# EAGLE board untitled2 (EAGLE 9.6.1)
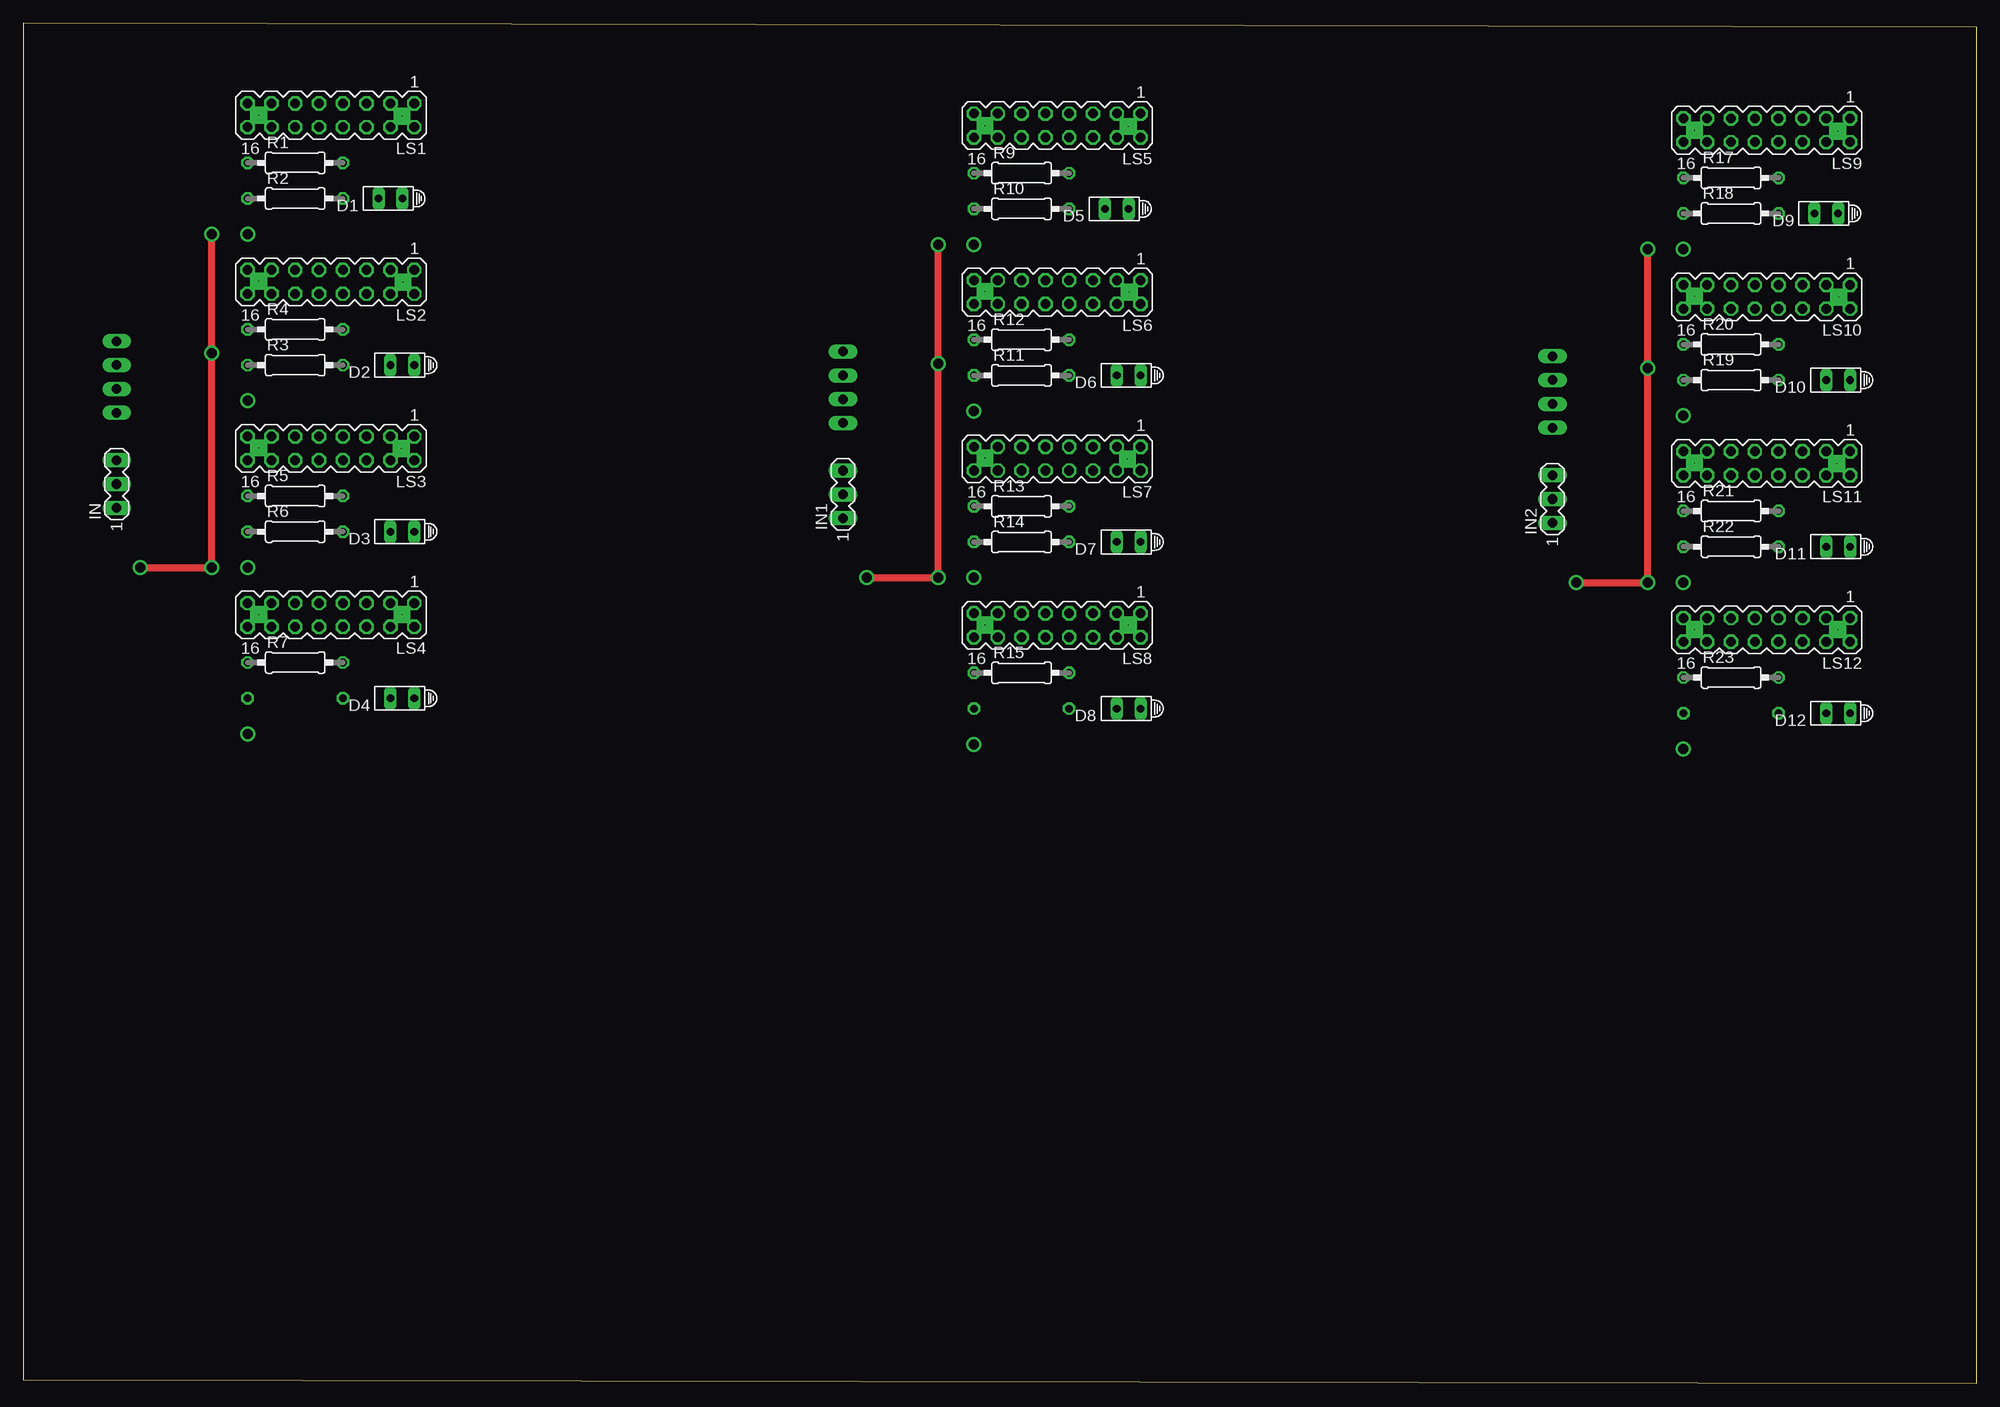
[diagram p0: board, top side]
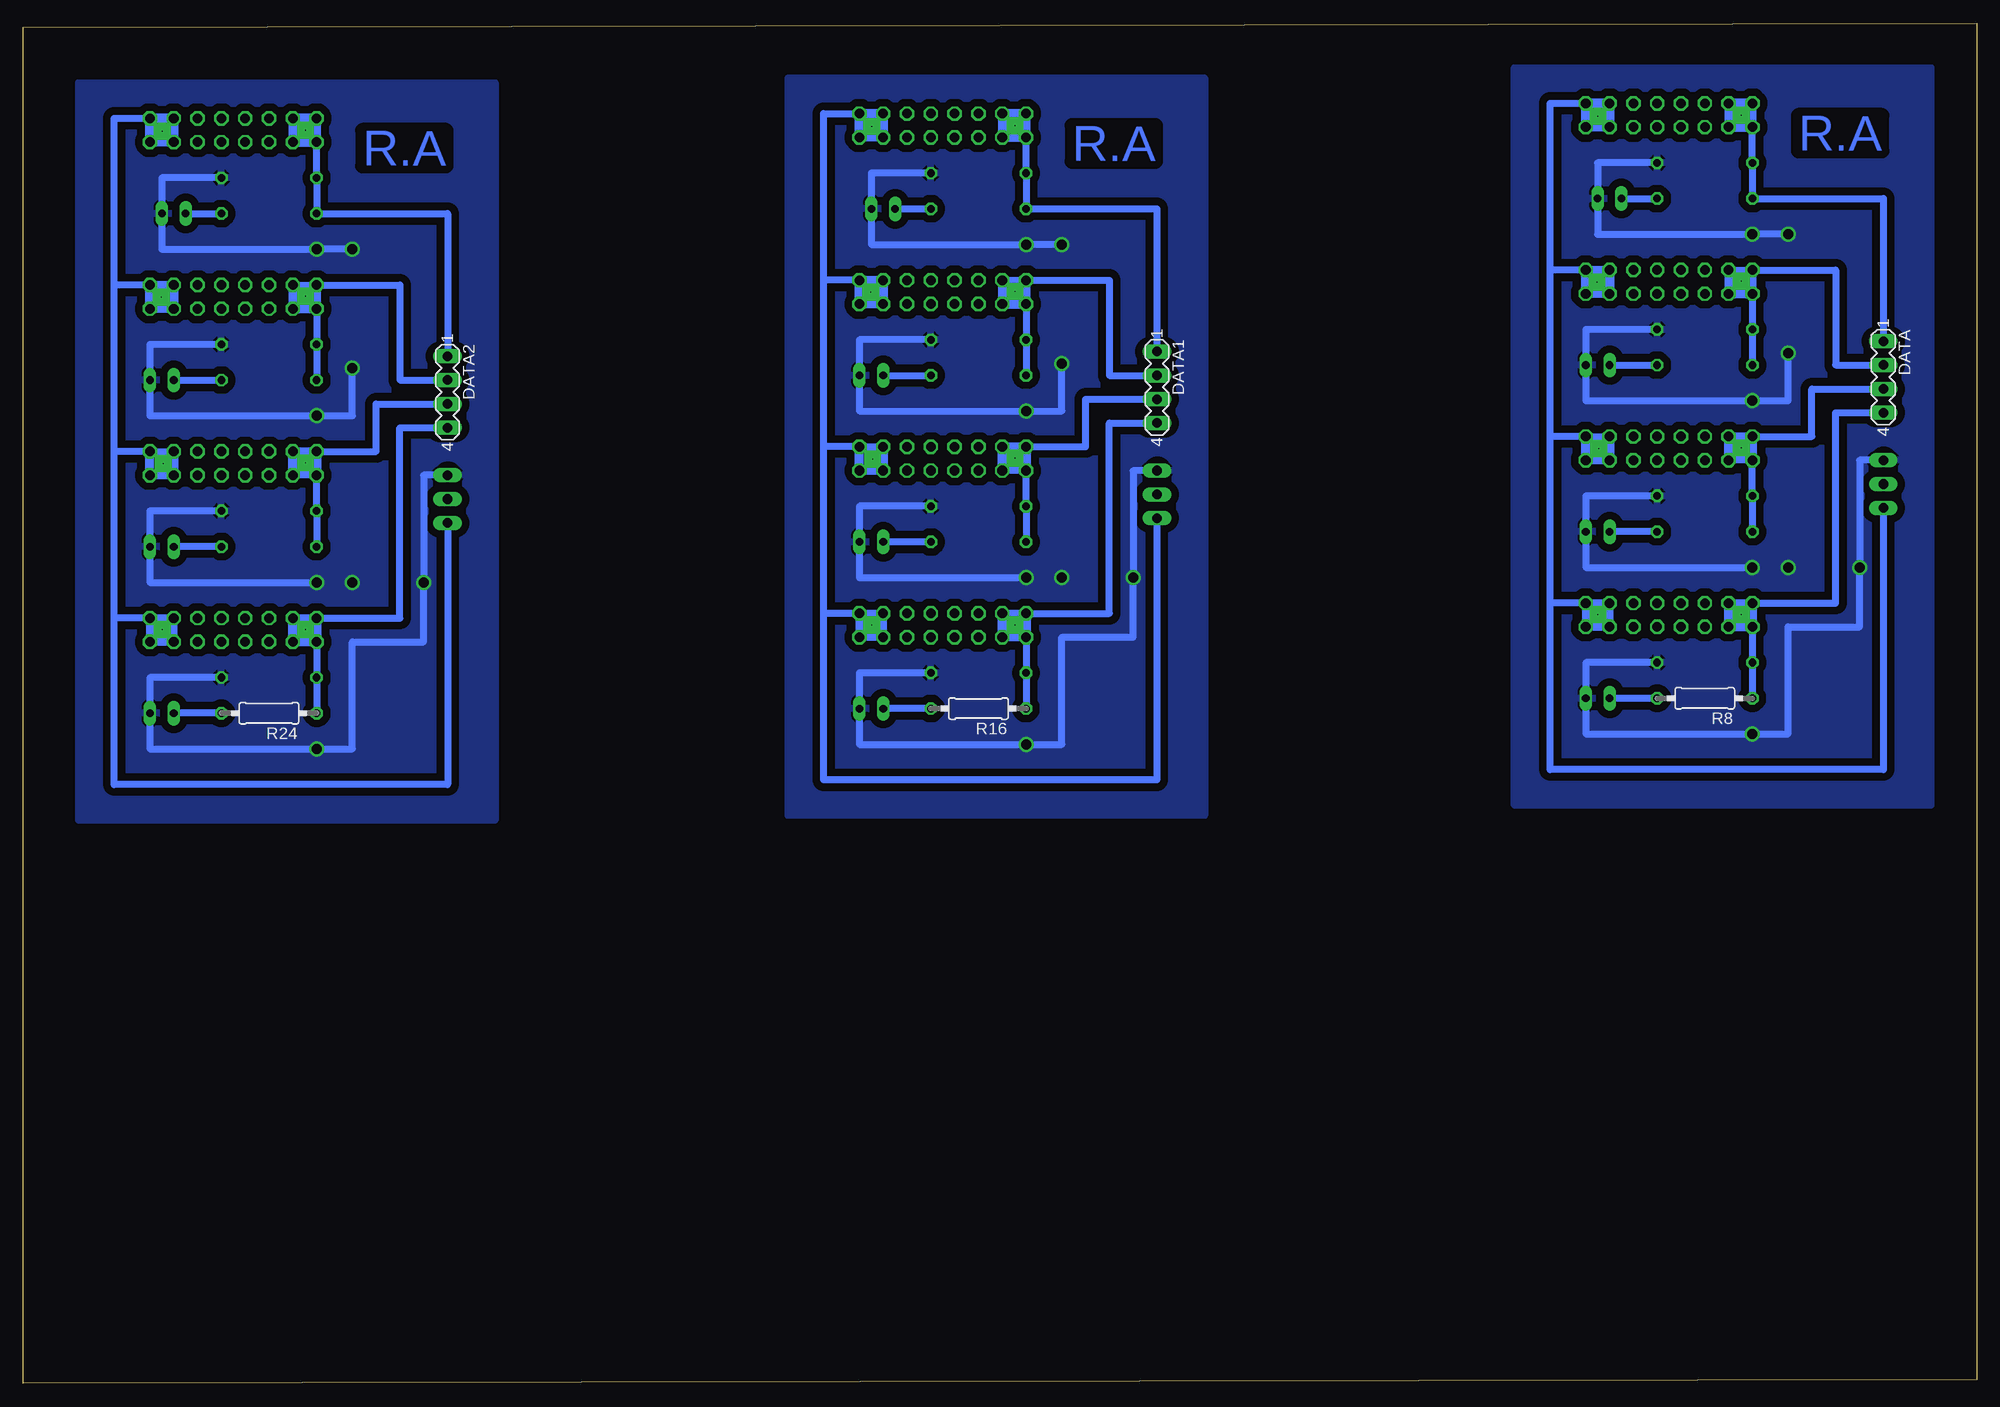
[diagram p1: board, bottom side, seen from below]

Size 208.4 x 145.17 mm. Coordinates in mm from the lower left corner, seen from the top.
Outline: 0,0.4 208.4,0 208.4,144.77 0,145.17 0,0.4
Copper layers (1*16): Top 0.035mm / dielectric 1.5mm / Bottom 0.035mm
Design rules "default": minimum track width 6mil, minimum drill 0.35mm, track to track 6mil, track to pad 6mil, pad to pad 6mil, via to via 6mil, smd to smd 6mil, copper to edge 40mil, drill to drill 6mil, minimum pad ring 10mil, minimum via ring 8mil, stop-mask expansion 4mil, vias tented up to drill 0mil, thermal gap 10mil

## Footprints (pad centres in the part's own frame; a part is rotated, then mirrored left to right if it is on the bottom)
HLMP6 = drill 0.813 long: A -1.27,0; K 1.27,0
MA04-1 = drill 1.016 long: 1 -3.81,0; 2 -1.27,0; 3 1.27,0; 4 3.81,0
MA03-1 = drill 1.016 long: 1 -2.54,0; 2 0,0; 3 2.54,0
MA08-2 = drill 1.016 octagon: 1 -8.89,-1.27; 2 -8.89,1.27; 3 -6.35,-1.27; 4 -6.35,1.27; 5 -3.81,-1.27; 6 -3.81,1.27; 7 -1.27,-1.27; 8 -1.27,1.27; 9 1.27,-1.27; 10 1.27,1.27; 11 3.81,-1.27; 12 3.81,1.27; 13 6.35,-1.27; 14 6.35,1.27; 15 8.89,-1.27; 16 8.89,1.27
0207/10 = drill 0.813 octagon: 1 -5.08,0; 2 5.08,0

## Placement (x,y rotation side)
D1  HLMP6  [HLMP6]  39.16,126.48 180 top
D2  HLMP6  [HLMP6]  40.43,108.7 180 top
D3  HLMP6  [HLMP6]  40.43,90.92 180 top
D4  HLMP6  [HLMP6]  40.43,73.14 180 top
D5  HLMP6  [HLMP6]  116.66,125.38 180 top
D6  HLMP6  [HLMP6]  117.93,107.6 180 top
D7  HLMP6  [HLMP6]  117.93,89.82 180 top
D8  HLMP6  [HLMP6]  117.93,72.04 180 top
D9  HLMP6  [HLMP6]  192.36,124.88 180 top
D10  HLMP6  [HLMP6]  193.63,107.1 180 top
D11  HLMP6  [HLMP6]  193.63,89.32 180 top
D12  HLMP6  [HLMP6]  193.63,71.54 180 top
DATA  [MA04-1]  9.95,107.43 270 bottom
DATA1  [MA04-1]  87.45,106.33 270 bottom
DATA2  [MA04-1]  163.15,105.83 270 bottom
IN  [MA03-1]  9.95,96 90 top
IN1  [MA03-1]  87.45,94.9 90 top
IN2  [MA03-1]  163.15,94.4 90 top
LS1  [MA08-2]  32.81,135.37 180 top
LS2  [MA08-2]  32.81,117.59 180 top
LS3  [MA08-2]  32.81,99.81 180 top
LS4  [MA08-2]  32.81,82.03 180 top
LS5  [MA08-2]  110.31,134.27 180 top
LS6  [MA08-2]  110.31,116.49 180 top
LS7  [MA08-2]  110.31,98.71 180 top
LS8  [MA08-2]  110.31,80.93 180 top
LS9  [MA08-2]  186.01,133.77 180 top
LS10  [MA08-2]  186.01,115.99 180 top
LS11  [MA08-2]  186.01,98.21 180 top
LS12  [MA08-2]  186.01,80.43 180 top
R1  [0207/10]  29,130.29 0 top
R2  [0207/10]  29,126.48 0 top
R3  [0207/10]  29,108.7 0 top
R4  [0207/10]  29,112.51 0 top
R5  [0207/10]  29,94.73 0 top
R6  [0207/10]  29,90.92 0 top
R7  [0207/10]  29,76.95 0 top
R8  [0207/10]  29,73.14 180 bottom
R9  [0207/10]  106.5,129.19 0 top
R10  [0207/10]  106.5,125.38 0 top
R11  [0207/10]  106.5,107.6 0 top
R12  [0207/10]  106.5,111.41 0 top
R13  [0207/10]  106.5,93.63 0 top
R14  [0207/10]  106.5,89.82 0 top
R15  [0207/10]  106.5,75.85 0 top
R16  [0207/10]  106.5,72.04 180 bottom
R17  [0207/10]  182.2,128.69 0 top
R18  [0207/10]  182.2,124.88 0 top
R19  [0207/10]  182.2,107.1 0 top
R20  [0207/10]  182.2,110.91 0 top
R21  [0207/10]  182.2,93.13 0 top
R22  [0207/10]  182.2,89.32 0 top
R23  [0207/10]  182.2,75.35 0 top
R24  [0207/10]  182.2,71.54 180 bottom

## Library data of the parts
D1-D12 = display-hp; MF: AGILENT TECHNOLOGIES; MPN: HLMP-6500; OC_FARNELL: 1652490; OC_NEWARK: 40K0088
DATA DATA1 DATA2 IN IN1 IN2 LS1-LS12 = con-lstb; OC_FARNELL: unknown; OC_NEWARK: unknown
R1-R24 = rcl; SPICEPREFIX: R

## Nets
GND: D1.A D2.A D3.A D4.A IN.3 R1.2 R4.2 R5.2 R7.2
GND1: D5.A D6.A D7.A D8.A IN1.3 R9.2 R12.2 R13.2 R15.2
GND2: D9.A D10.A D11.A D12.A IN2.3 R17.2 R20.2 R21.2 R23.2
N$1: DATA.1 LS1.13 LS1.14 LS1.15 LS1.16 R1.1 R2.1
N$2: D2.K R3.2
N$3: DATA.2 LS2.13 LS2.14 LS2.15 LS2.16 R3.1 R4.1
N$4: D3.K R6.2
N$5: D1.K R2.2
N$6: DATA.3 LS3.13 LS3.14 LS3.15 LS3.16 R5.1 R6.1
N$7: D4.K R8.2
N$8: DATA.4 LS4.13 LS4.14 LS4.15 LS4.16 R7.1 R8.1
N$9: IN.1 LS1.1 LS1.2 LS1.3 LS1.4 LS2.1 LS2.2 LS2.3 LS2.4 LS3.1 LS3.2 LS3.3 LS3.4 LS4.1 LS4.2 LS4.3 LS4.4
N$21: D5.K R10.2
N$22: DATA1.1 LS5.13 LS5.14 LS5.15 LS5.16 R9.1 R10.1
N$23: D6.K R11.2
N$24: DATA1.2 LS6.13 LS6.14 LS6.15 LS6.16 R11.1 R12.1
N$25: D7.K R14.2
N$26: DATA1.3 LS7.13 LS7.14 LS7.15 LS7.16 R13.1 R14.1
N$27: D8.K R16.2
N$28: DATA1.4 LS8.13 LS8.14 LS8.15 LS8.16 R15.1 R16.1
N$29: IN1.1 LS5.1 LS5.2 LS5.3 LS5.4 LS6.1 LS6.2 LS6.3 LS6.4 LS7.1 LS7.2 LS7.3 LS7.4 LS8.1 LS8.2 LS8.3 LS8.4
N$41: D9.K R18.2
N$42: DATA2.1 LS9.13 LS9.14 LS9.15 LS9.16 R17.1 R18.1
N$43: D10.K R19.2
N$44: DATA2.2 LS10.13 LS10.14 LS10.15 LS10.16 R19.1 R20.1
N$45: D11.K R22.2
N$46: DATA2.3 LS11.13 LS11.14 LS11.15 LS11.16 R21.1 R22.1
N$47: D12.K R24.2
N$48: DATA2.4 LS12.13 LS12.14 LS12.15 LS12.16 R23.1 R24.1
N$49: IN2.1 LS9.1 LS9.2 LS9.3 LS9.4 LS10.1 LS10.2 LS10.3 LS10.4 LS11.1 LS11.2 LS11.3 LS11.4 LS12.1 LS12.2 LS12.3 LS12.4

## Tracks (layer width: path | path; a pad name or v marks a point on that pad's centre or on a via)
GND  (via drill 0.03 pad 1.27, 0.76 pad 1.27, 1.07 pad 0.81)
  Top 0.762: v12.49,87.11 v20.11,87.11 v20.11,109.97 v20.11,122.67
  Bottom 0.762: R1.2 40.43,130.29 D1.A 40.43,122.67 v23.92,122.67 v20.11,122.67 | R4.2 41.7,112.51 D2.A 41.7,104.89 v23.92,104.89 20.11,104.89 v20.11,109.97 | R5.2 41.7,94.73 D3.A 41.7,87.11 v23.92,87.11 | R7.2 41.7,76.95 D4.A 41.7,69.33 v23.92,69.33 20.11,69.33 20.11,80.76 12.49,80.76 v12.49,87.11 12.49,98.54 IN.3
  pour Bottom (isolate 0.813): 49.32,140.45 4.87,140.45 4.87,61.71 49.32,61.71
GND1  (via drill 0.03 pad 1.27, 0.76 pad 1.27, 1.07 pad 0.81)
  Top 0.762: v89.99,86.01 v97.61,86.01 v97.61,108.87 v97.61,121.57
  Bottom 0.762: R9.2 117.93,129.19 D5.A 117.93,121.57 v101.42,121.57 v97.61,121.57 | R12.2 119.2,111.41 D6.A 119.2,103.79 v101.42,103.79 97.61,103.79 v97.61,108.87 | R13.2 119.2,93.63 D7.A 119.2,86.01 v101.42,86.01 | R15.2 119.2,75.85 D8.A 119.2,68.23 v101.42,68.23 97.61,68.23 97.61,79.66 89.99,79.66 v89.99,86.01 89.99,97.44 IN1.3
  pour Bottom (isolate 0.813): 126.82,139.35 82.37,139.35 82.37,60.61 126.82,60.61
GND2  (via drill 0.03 pad 1.27, 0.76 pad 1.27, 1.07 pad 0.81)
  Top 0.762: v165.69,85.51 v173.31,85.51 v173.31,108.37 v173.31,121.07
  Bottom 0.762: R17.2 193.63,128.69 D9.A 193.63,121.07 v177.12,121.07 v173.31,121.07 | R20.2 194.9,110.91 D10.A 194.9,103.29 v177.12,103.29 173.31,103.29 v173.31,108.37 | R21.2 194.9,93.13 D11.A 194.9,85.51 v177.12,85.51 | R23.2 194.9,75.35 D12.A 194.9,67.73 v177.12,67.73 173.31,67.73 173.31,79.16 165.69,79.16 v165.69,85.51 165.69,96.94 IN2.3
  pour Bottom (isolate 0.813): 202.52,138.85 158.07,138.85 158.07,60.11 202.52,60.11
N$1
  Bottom 0.762: LS1.16 R1.1 R2.1 9.95,126.48 DATA.1
  Bottom 0.965: LS1.15 LS1.13 LS1.14 LS1.16 LS1.15
N$2
  Bottom 0.762: D2.K R3.2
N$3
  Bottom 0.762: LS2.16 R4.1 R3.1 | DATA.2 15.03,108.7 15.03,118.86 LS2.15 LS2.13
  Bottom 0.965: LS2.13 LS2.14 LS2.16 LS2.15
N$4
  Bottom 0.762: R6.2 D3.K
N$5
  Bottom 0.762: D1.K R2.2
N$6
  Bottom 0.762: R6.1 R5.1 LS3.16 LS3.14 | LS3.15 17.57,101.08 17.57,106.16 DATA.3
  Bottom 0.965: LS3.14 LS3.13 LS3.15 LS3.16
N$7
  Bottom 0.762: R8.2 D4.K
N$8
  Bottom 0.762: LS4.13 LS4.15 15.03,83.3 15.03,103.62 DATA.4 | LS4.16 R7.1 R8.1
  Bottom 0.965: LS4.13 LS4.14 LS4.16 LS4.15
N$9
  Bottom 0.762: IN.1 9.95,65.52 45.51,65.52 45.51,83.3 | LS1.1 45.51,136.64 45.51,118.86 | 45.51,83.3 45.51,101.08 | 45.51,101.08 45.51,118.86 | LS2.1 45.51,118.86 | LS3.3 LS3.1 45.51,101.08 | 45.51,83.3 LS4.1 LS4.3
  Bottom 0.813: LS4.1 LS4.2 LS4.4 LS4.3
  Bottom 0.965: LS3.3 LS3.4 LS3.2 LS3.1 | LS2.3 LS2.4 LS2.2 LS2.1 LS2.3 | LS1.4 LS1.2 LS1.1 LS1.3 LS1.4
N$10  (via drill 0.76 pad 1.27)
  other vias: 9.9,98.57
N$11  (via drill 0.76 pad 1.27)
  other vias: 9.9,95.87
N$12  (via drill 0.76 pad 1.27)
  other vias: 9.9,93.47
N$13  (via drill 0.1 pad 1.8)
  other vias: 25.1,117.67
N$14  (via drill 0.1 pad 1.8)
  other vias: 40.5,117.57
N$15  (via drill 0.1 pad 1.8)
  other vias: 25.1,99.87
N$16  (via drill 0.1 pad 1.8)
  other vias: 40.3,99.77
N$17  (via drill 0.1 pad 1.8)
  other vias: 25.1,82.07
N$18  (via drill 0.1 pad 1.8)
  other vias: 40.4,82.07
N$19  (via drill 0.1 pad 1.8)
  other vias: 40.4,135.27
N$20  (via drill 0.1 pad 1.8)
  other vias: 25.1,135.37
N$21
  Bottom 0.762: D5.K R10.2
N$22
  Bottom 0.762: LS5.16 R9.1 R10.1 87.45,125.38 DATA1.1
  Bottom 0.965: LS5.15 LS5.13 LS5.14 LS5.16 LS5.15
N$23
  Bottom 0.762: D6.K R11.2
N$24
  Bottom 0.762: LS6.16 R12.1 R11.1 | DATA1.2 92.53,107.6 92.53,117.76 LS6.15 LS6.13
  Bottom 0.965: LS6.13 LS6.14 LS6.16 LS6.15
N$25
  Bottom 0.762: R14.2 D7.K
N$26
  Bottom 0.762: R14.1 R13.1 LS7.16 LS7.14 | LS7.15 95.07,99.98 95.07,105.06 DATA1.3
  Bottom 0.965: LS7.14 LS7.13 LS7.15 LS7.16
N$27
  Bottom 0.762: R16.2 D8.K
N$28
  Bottom 0.762: LS8.13 LS8.15 92.53,82.2 92.53,102.52 DATA1.4 | LS8.16 R15.1 R16.1
  Bottom 0.965: LS8.13 LS8.14 LS8.16 LS8.15
N$29
  Bottom 0.762: IN1.1 87.45,64.42 123.01,64.42 123.01,82.2 | LS5.1 123.01,135.54 123.01,117.76 | 123.01,82.2 123.01,99.98 | 123.01,99.98 123.01,117.76 | LS6.1 123.01,117.76 | LS7.3 LS7.1 123.01,99.98 | 123.01,82.2 LS8.1 LS8.3
  Bottom 0.813: LS8.1 LS8.2 LS8.4 LS8.3
  Bottom 0.965: LS7.3 LS7.4 LS7.2 LS7.1 | LS6.3 LS6.4 LS6.2 LS6.1 LS6.3 | LS5.4 LS5.2 LS5.1 LS5.3 LS5.4
N$30  (via drill 0.76 pad 1.27)
  other vias: 87.4,97.47
N$31  (via drill 0.76 pad 1.27)
  other vias: 87.4,94.77
N$32  (via drill 0.76 pad 1.27)
  other vias: 87.4,92.37
N$33  (via drill 0.1 pad 1.8)
  other vias: 102.6,116.57
N$34  (via drill 0.1 pad 1.8)
  other vias: 118,116.47
N$35  (via drill 0.1 pad 1.8)
  other vias: 102.6,98.77
N$36  (via drill 0.1 pad 1.8)
  other vias: 117.8,98.67
N$37  (via drill 0.1 pad 1.8)
  other vias: 102.6,80.97
N$38  (via drill 0.1 pad 1.8)
  other vias: 117.9,80.97
N$39  (via drill 0.1 pad 1.8)
  other vias: 117.9,134.17
N$40  (via drill 0.1 pad 1.8)
  other vias: 102.6,134.27
N$41
  Bottom 0.762: D9.K R18.2
N$42
  Bottom 0.762: LS9.16 R17.1 R18.1 163.15,124.88 DATA2.1
  Bottom 0.965: LS9.15 LS9.13 LS9.14 LS9.16 LS9.15
N$43
  Bottom 0.762: D10.K R19.2
N$44
  Bottom 0.762: LS10.16 R20.1 R19.1 | DATA2.2 168.23,107.1 168.23,117.26 LS10.15 LS10.13
  Bottom 0.965: LS10.13 LS10.14 LS10.16 LS10.15
N$45
  Bottom 0.762: R22.2 D11.K
N$46
  Bottom 0.762: R22.1 R21.1 LS11.16 LS11.14 | LS11.15 170.77,99.48 170.77,104.56 DATA2.3
  Bottom 0.965: LS11.14 LS11.13 LS11.15 LS11.16
N$47
  Bottom 0.762: R24.2 D12.K
N$48
  Bottom 0.762: LS12.13 LS12.15 168.23,81.7 168.23,102.02 DATA2.4 | LS12.16 R23.1 R24.1
  Bottom 0.965: LS12.13 LS12.14 LS12.16 LS12.15
N$49
  Bottom 0.762: IN2.1 163.15,63.92 198.71,63.92 198.71,81.7 | LS9.1 198.71,135.04 198.71,117.26 | 198.71,81.7 198.71,99.48 | 198.71,99.48 198.71,117.26 | LS10.1 198.71,117.26 | LS11.3 LS11.1 198.71,99.48 | 198.71,81.7 LS12.1 LS12.3
  Bottom 0.813: LS12.1 LS12.2 LS12.4 LS12.3
  Bottom 0.965: LS11.3 LS11.4 LS11.2 LS11.1 | LS10.3 LS10.4 LS10.2 LS10.1 LS10.3 | LS9.4 LS9.2 LS9.1 LS9.3 LS9.4
N$50  (via drill 0.76 pad 1.27)
  other vias: 163.1,96.97
N$51  (via drill 0.76 pad 1.27)
  other vias: 163.1,94.27
N$52  (via drill 0.76 pad 1.27)
  other vias: 163.1,91.87
N$53  (via drill 0.1 pad 1.8)
  other vias: 178.3,116.07
N$54  (via drill 0.1 pad 1.8)
  other vias: 193.7,115.97
N$55  (via drill 0.1 pad 1.8)
  other vias: 178.3,98.27
N$56  (via drill 0.1 pad 1.8)
  other vias: 193.5,98.17
N$57  (via drill 0.1 pad 1.8)
  other vias: 178.3,80.47
N$58  (via drill 0.1 pad 1.8)
  other vias: 193.6,80.47
N$59  (via drill 0.1 pad 1.8)
  other vias: 193.6,133.67
N$60  (via drill 0.1 pad 1.8)
  other vias: 178.3,133.77

## Text on the board
Bottom: R.A | R.A | R.A